# Altium PCB newMYPCB.PcbDoc
Units mil, origin at the board's own origin, x right, y up, seen from the top; angles counter-clockwise.
Board outline 6000 x 4000 mil, 2 copper layers (Top Layer, Bottom Layer); 56 components, 75 nets, 228 pads, 34 vias.
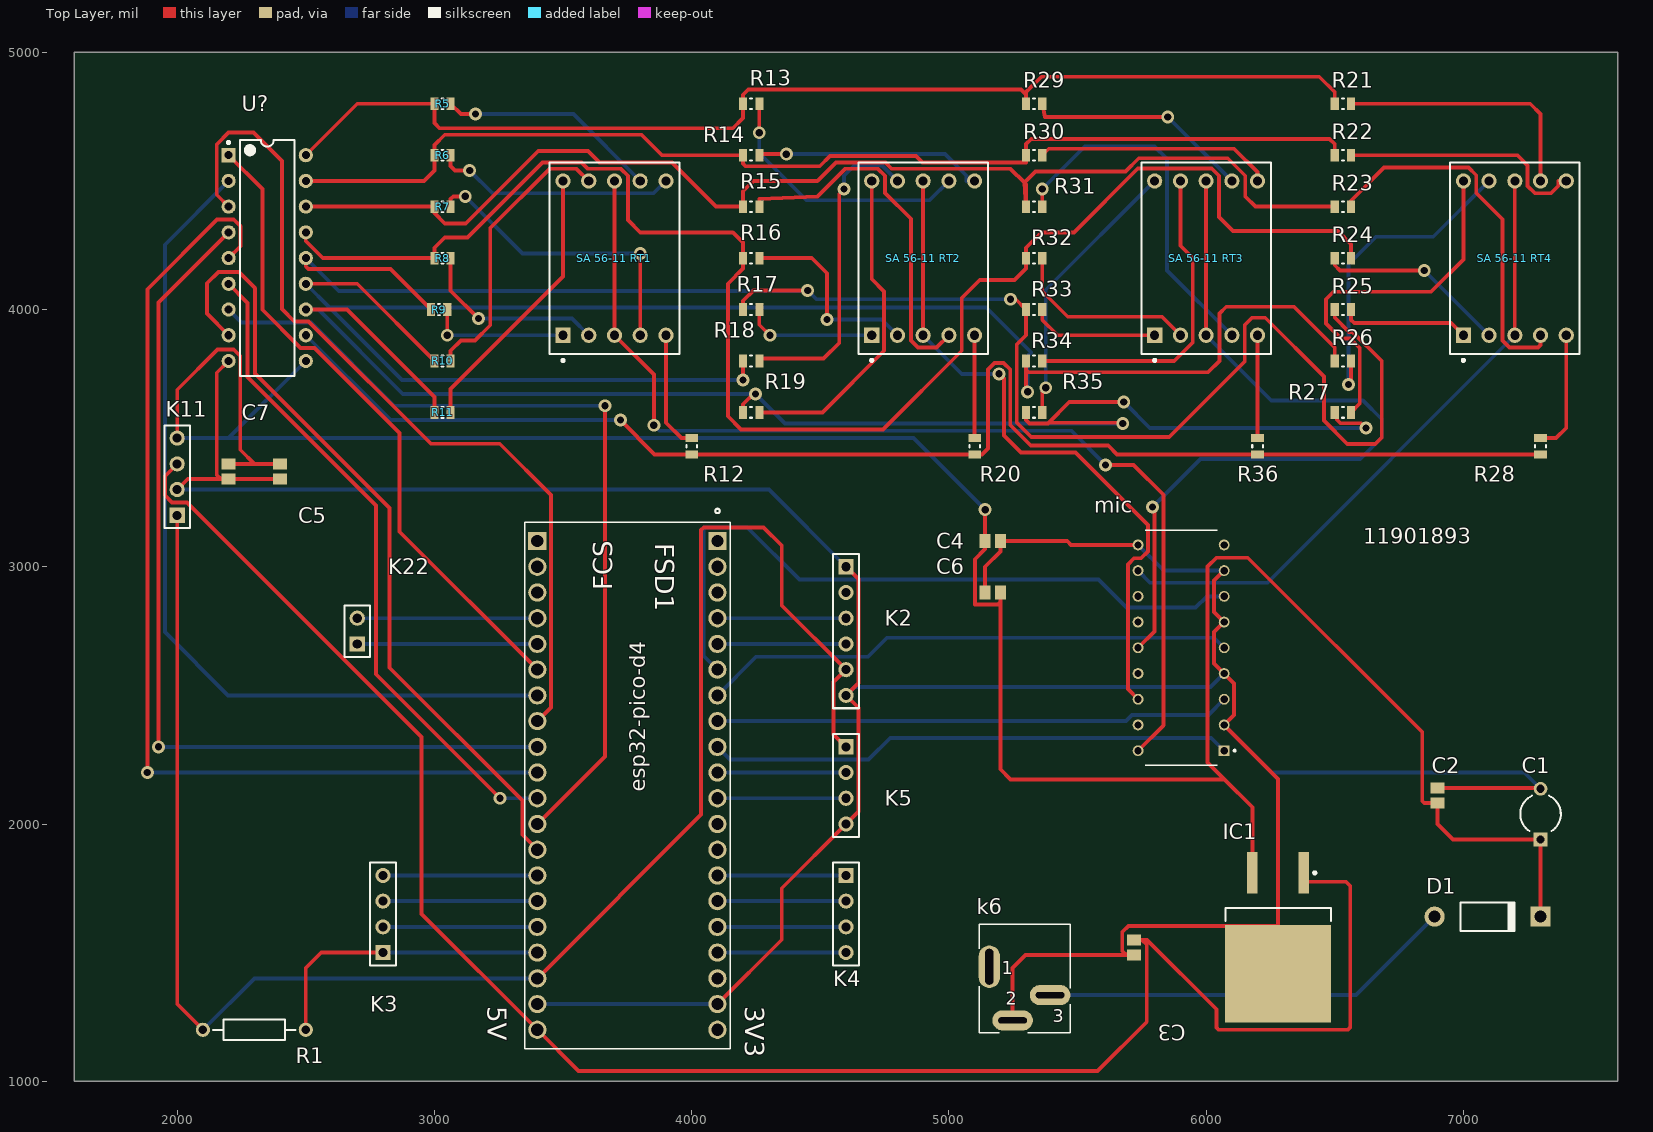
[diagram p0: Top Layer view]
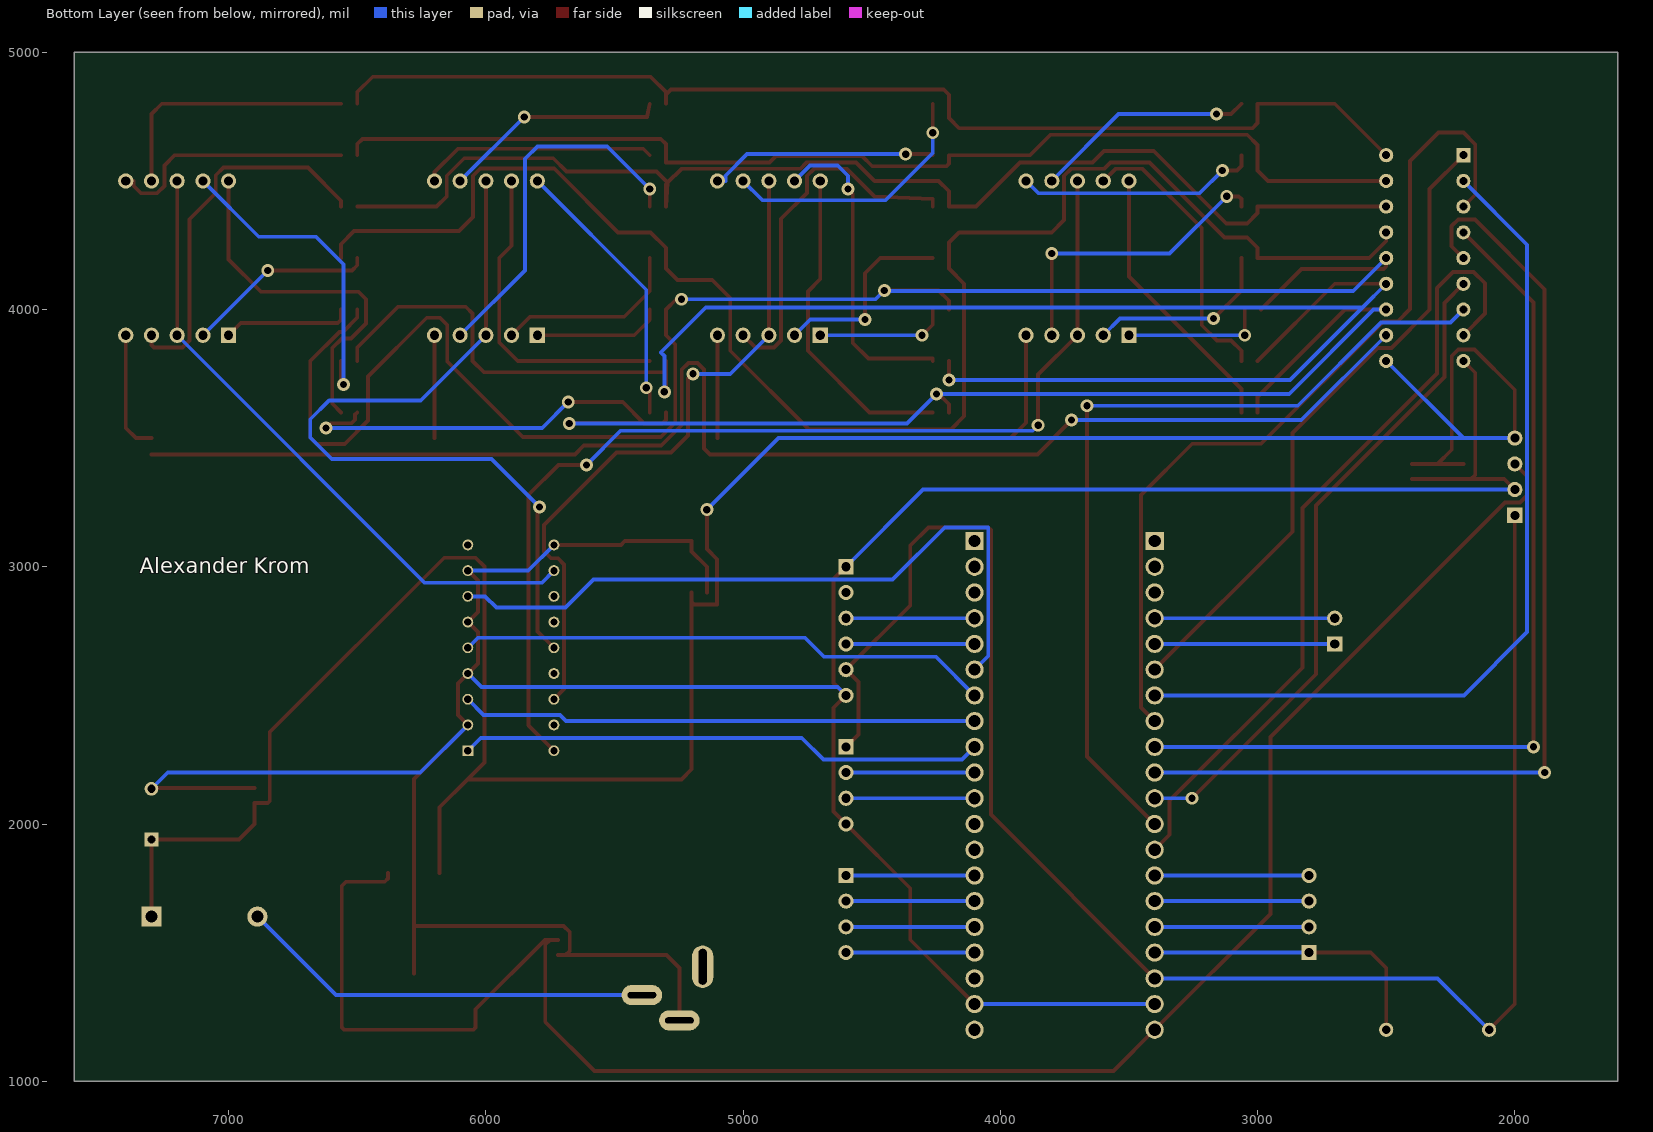
[diagram p1: Bottom Layer view, seen from below]

## Layer stack, top to bottom
Top Solder: solder mask 0.4, Solder Resist, Dk 3.5
Top Layer: signal copper 1.4
Dielectric 1: dielectric 12.6, FR-4, Dk 4.8
Bottom Layer: signal copper 1.4
Bottom Solder: solder mask 0.4, Solder Resist, Dk 3.5

## Board outline
1600,1000 7600,1000 7600,5000 1600,5000

## Design rules (kind name [scope] priority, off if disabled: settings)
Clearance [All] p1: gap=10 ignorepadtopadclearanceinfootprint=FALSE except(0: Arc-Hole Track-Hole SMDPad-Hole THPad-Hole Via-Hole Fill-Hole Poly-Hole Region-Hole Text-Hole)
PolygonConnect [All] p1: connectstyle=Relief reliefconductorwidth=10 reliefentries=4 polygonreliefangle="90 Angle" airgapwidth=10
RoutingVias [All] p1: holewidth=28 width=50 viastyle="Through Hole" minholewidth=28 minwidth=50 maxholewidth=28 maxwidth=50
SolderMaskExpansion [All] p1: expansion=4 istentingtop=FALSE
Width [All] p1: maxlimit=30 minlimit=10 preferedwidth=15 minimp=50.000000 maximp=50.000000 favimp=50.000000
30 further rules are at their usual default settings.

## Components (designator, comment, footprint, x,y, rotation, side; value= is the part's Value field where it differs from the comment)
C1 "Cap Pol1" CAPR5-4X5 7300,2038.42 r90 top value=100μF
C2 "Cap Pol3" C0805 6900,2110.47 r90 top value=330nF
C3 "Cap Pol3" C0805 5720,1520 r270 top value=100nF
C4 "Cap Pol3" C0805 5170.47,3100 r0 top value=1μF
C5 "Cap Pol3" C0805 2400,3370.47 r270 top value=1μ
C6 "Cap Pol3" C0805 5170.47,2900 r180 top value=100nF
C7 "Cap Pol3" C0805 2200,3370.47 r270 top value=100nF
D1 "Diode" DO-41 7094.09,1640 r0 top
esp32-pico-d4 "esp32-pico-d4" esp32picod4 3730,2155 r270 top
IC1 "L7805CD2T-TR" TO-263_M 6280,1560 r270 top
K2 "Header 6" HDR1X6 4600,3000 r270 top
K3 "Header 4" HDR1X4 2800,1500 r90 top
K4 "Header 4" HDR1X4 4600,1800 r270 top
K5 "Header 4" HDR1X4 4600,2300 r270 top
k6 "k6" k6 5300,1400 r0 top
K11 "Header 4" HDR1X4 2000,3200 r90 top
K22 "Header 2" HDR1X2 2700,2700 r90 top
mic "MIC2981" MIC2981 5900,2700 r180 top
R1 "Res2" AXIAL-0.4 2300,1200 r0 top value=1K
R5 "Res2" smd43 3031.5,4800 r0 top value=43Ω
R6 "Res2" smd43 3031.5,4600 r0 top value=43Ω
R7 "Res2" smd43 3031.5,4400 r0 top value=43Ω
R8 "Res2" smd43 3031.5,4200 r0 top value=43Ω
R9 "Res2" smd43 3018.5,4000 r0 top value=43Ω
R10 "Res2" smd43 3031.5,3800 r0 top value=43Ω
R11 "Res2" smd43 3031.5,3600 r0 top value=43Ω
R12 "Res2" smd43 4000,3468.5 r90 top value=680Ω
R13 "Res2" smd43 4231.5,4800 r0 top value=43Ω
R14 "Res2" smd43 4231.5,4600 r0 top value=43Ω
R15 "Res2" smd43 4231.5,4400 r0 top value=43Ω
R16 "Res2" smd43 4231.5,4200 r0 top value=43Ω
R17 "Res2" smd43 4231.5,4000 r0 top value=43Ω
R18 "Res2" smd43 4231.5,3800 r0 top value=43Ω
R19 "Res2" smd43 4231.5,3600 r0 top value=43Ω
R20 "Res2" smd43 5100,3468.5 r90 top value=680Ω
R21 "Res2" smd43 6531.5,4800 r0 top value=43Ω
R22 "Res2" smd43 6531.5,4600 r0 top value=43Ω
R23 "Res2" smd43 6531.5,4400 r0 top value=43Ω
R24 "Res2" smd43 6531.5,4200 r180 top value=43Ω
R25 "Res2" smd43 6531.5,4000 r0 top value=43Ω
R26 "Res2" smd43 6531.5,3800 r0 top value=43Ω
R27 "Res2" smd43 6531.5,3600 r0 top value=43Ω
R28 "Res2" smd43 7300,3468.5 r90 top value=680Ω
R29 "Res2" smd43 5331.5,4800 r0 top value=43Ω
R30 "Res2" smd43 5331.5,4600 r0 top value=43Ω
R31 "Res2" smd43 5331.5,4400 r0 top value=43Ω
R32 "Res2" smd43 5331.5,4200 r0 top value=43Ω
R33 "Res2" smd43 5331.5,4000 r0 top value=43Ω
R34 "Res2" smd43 5331.5,3800 r0 top value=43Ω
R35 "Res2" smd43 5331.5,3600 r0 top value=43Ω
R36 "Res2" smd43 6200,3468.5 r90 top value=680Ω
"SA 56-11 RT1" "Dpy Blue-CA" H 3700,4200 r0 top
"SA 56-11 RT2" "Dpy Blue-CA" H 4900,4200 r0 top
"SA 56-11 RT3" "Dpy Blue-CA" H 6000,4200 r0 top
"SA 56-11 RT4" "Dpy Blue-CA" H 7200,4200 r0 top
U? "ULN2803A" STM-DIP-18 2350,4200 r0 top

## Footprints (in the part's own frame and the unit in brackets; to place one, negate y for a bottom-side part, rotate by r counter-clockwise, add the part's x,y. Pads: shape width x height; smd on the part's side, far side on the other; paste and mask are expansions set on the pad)
AXIAL-0.4 [mm] "Axial Device, Thru-Hole; 2 Leads; 0.4 in Pin Spacing"
  round 1.4 hole 0.85: 1(-5.08,0) 2(5.08,0)
  silkscreen extent -4.06,-1.02 4.06,1.02
C0805 [mm] "Chip Capacitor, Body 2.0x1.3mm, IPC High Density"
  rect 1.1x1.4 smd: 1(-0.75,0) 2(0.75,0)
  body extent -1.1,-0.72 1.1,0.72, height 1.4
CAPR5-4X5 [mm] "Capacitor; 2 Leads"
  rect 1.35x1.35 hole 0.8: 1(-2.5,0)
  round 1.35 hole 0.8: 2(2.5,0)
  silkscreen extent -1.69,-2 1.82,2
DO-41 [mm] "Diode, Axial; Body 5.2 x 2.7 mm (LxDia. max), Lead Dia. 0.86 mm (max)"
  round 2 hole 1.2: 1(-5.23,0)
  rect 2x2 hole 1.2: 2(5.23,0)
  silkscreen extent -2.65,-1.4 2.75,1.4
esp32picod4 [mm]
  rect 1.8x1.8 hole 1.2: 1(-24.003,-8.382) 40(-24.003,9.398)
  round 1.8 hole 1.2: 2(-21.463,-8.382) 3(-18.923,-8.382) 4(-16.383,-8.382) 5(-13.843,-8.382) 6(-11.303,-8.382) 7(-8.763,-8.382) 8(-6.223,-8.382) 9(-3.683,-8.382) 10(-1.143,-8.382) 11(1.397,-8.382) 12(3.937,-8.382) 13(6.477,-8.382) 14(9.017,-8.382) 15(11.557,-8.382) 16(14.097,-8.382) 17(16.637,-8.382) 18(19.177,-8.382) 19(21.717,-8.382) 20(24.257,-8.382) 21(24.257,9.398) 22(21.717,9.398) 23(19.177,9.398) 24(16.637,9.398) 25(14.097,9.398) 26(11.557,9.398) 27(9.017,9.398) 28(6.477,9.398) 29(3.937,9.398) 30(1.397,9.398) 31(-1.143,9.398) 32(-3.683,9.398) 33(-6.223,9.398) 34(-8.763,9.398) 35(-11.303,9.398) 36(-13.843,9.398) 37(-16.383,9.398) 38(-18.923,9.398) 39(-21.463,9.398)
  silkscreen extent -27.2,-9.64 26.13,10.66
H [mm] "LED, 7-Segment Display, 14.2 mm, RHD; 10 Leads; Row Space 15.24 mm; Pitch 2.54 mm"
  rect 1.5x1.5 hole 0.9: 1(-5.08,-7.62)
  round 1.5 hole 0.9: 2(-2.54,-7.62) 3(0,-7.62) 4(2.54,-7.62) 5(5.08,-7.62) 6(5.08,7.62) 7(2.54,7.62) 8(0,7.62) 9(-2.54,7.62) 10(-5.08,7.62)
  silkscreen extent -6.4,-10.22 6.4,9.45, body extent -6.4,-9.45 6.4,9.45, height 8.25
HDR1X2 [mm] "Connector; Header; 2 Position"
  rect 1.5x1.5 hole 0.9: 1(0,0)
  round 1.5 hole 0.9: 2(2.54,0)
  silkscreen extent -1.27,-1.27 3.81,1.27
HDR1X4 [mm] "Connector; Header; 4 Position"
  rect 1.5x1.5 hole 0.9: 1(0,0)
  round 1.5 hole 0.9: 2(2.54,0) 3(5.08,0) 4(7.62,0)
  silkscreen extent -1.27,-1.27 8.89,1.27
HDR1X6 [mm] "Connector; Header; 6 Position"
  rect 1.5x1.5 hole 0.9: 1(0,0)
  round 1.5 hole 0.9: 2(2.54,0) 3(5.08,0) 4(7.62,0) 5(10.16,0) 6(12.7,0)
  silkscreen extent -1.27,-1.27 13.97,1.27
k6 [mm]
  oval 2.1x4.2 hole 0.8 slot 3.52 at 90 deg: 1(-3.627,1.143)
  oval 4x2 hole 0.6 slot 2.82 at 0 deg: 2(-1.327,-4.157) 3(2.373,-1.657)
  silkscreen extent -4.63,-5.36 4.37,5.34
MIC2981 [mm]
  rect 1.07x1.07 hole 0.72: 1(-4.318,10.541)
  round 1.07 hole 0.72: 2(-4.318,8.001) 3(-4.318,5.461) 4(-4.318,2.921) 5(-4.318,0.381) 6(-4.318,-2.159) 7(-4.318,-4.699) 8(-4.318,-7.239) 9(-4.318,-9.779) 10(4.182,-9.779) 11(4.182,-7.239) 12(4.182,-4.699) 13(4.182,-2.159) 14(4.182,0.381) 15(4.182,2.921) 16(4.182,5.461) 17(4.182,8.001) 18(4.182,10.541)
  silkscreen extent -5.45,-11.24 3.48,12
smd43 [mm]
  rect 0.8x1.25 smd: 1(-0.8,0) 2(0.8,0)
  silkscreen extent -0.1,-0.53 0.1,0.53, body extent -1.05,-0.67 1.05,0.67, height 0.6
STM-DIP-18 [mm] "DIP, 18-Leads, Body 23.25x7.1mm, Pitch 2.54mm"
  rect 1.4x1.4 hole 0.8: 1(-3.81,10.16)
  round 1.4 hole 0.8: 2(-3.81,7.62) 3(-3.81,5.08) 4(-3.81,2.54) 5(-3.81,0) 6(-3.81,-2.54) 7(-3.81,-5.08) 8(-3.81,-7.62) 9(-3.81,-10.16) 10(3.81,-10.16) 11(3.81,-7.62) 12(3.81,-5.08) 13(3.81,-2.54) 14(3.81,0) 15(3.81,2.54) 16(3.81,5.08) 17(3.81,7.62) 18(3.81,10.16)
  silkscreen extent -3.93,-11.65 2.7,11.65, body extent -3.93,-11.63 3.93,11.63, height 3.93
TO-263_M [mm] "D2-PAK, 4-Leads, Body 9.2x10.2mm, Pitch 2.54mm, Lead Span 15.4mm, IPC Low Density"
  rect 4.1x1.05 smd: 1(-6.35,2.54) 3(-6.35,-2.54)
  rect 9.6x10.45 smd: 4(3.6,0)
  silkscreen extent -6.47,-5.2 -1.6,5.2, body extent -2.9,-5.2 6.45,5.2, height 4.6

## Part data
C1: "Polarized Capacitor (Radial)", LatestRevisionDate=17-Jul-2002, LatestRevisionNote="Re-released for DXP Platform.", PackageDescription="Polarized Capacitor (Radial); 2 Leads", PackageReference=RB7.6-15, Published=8-Jun-2000, Publisher="Altium Limited"
C2 C3 C4 C5 C6 C7: "Polarized Capacitor (Surface Mount)", LatestRevisionDate=29-May-2009, LatestRevisionNote="IPC-7351 Footprint Added.", PackageDescription="Chip Capacitor", PackageReference=C0805, Published=8-Jun-2000, Publisher="Altium Limited"
D1: library part "Diode 1N4002", "1 Amp General Purpose Rectifier", Code_JEDEC=DO-204-AL, ComponentLink1Description="Manufacturer Link", ComponentLink1URL=http://www.fairchildsemi.com/, ComponentLink2Description=Datasheet, ComponentLink2URL=http://www.fairchildsemi.com/ds/1N%2F1N4001.pdf, DatasheetVersion=1998, LatestRevisionDate=17-Jul-2002, LatestRevisionNote="Re-released for DXP Platform.", PackageDescription="Diode, Axial; Body 5.2 x 2.7 mm (LxDia. max), Lead Dia. 0.86 mm (max)", PackageReference=DO-41, PackageVersion=Aug-1999, Published=8-Jun-2000, Publisher="Altium Limited"
esp32-pico-d4: library part "picoESP32-PICO-KIT V"
IC1: library part CMP-0244-00213-1, "Positive Voltage Regulator, 3-Pin D2PAK, Tape and Reel", ComponentLink1Description="Manufacturer URL", ComponentLink1URL=http://www.st.com, ComponentLink2Description=Datasheet, ComponentLink2URL=http://www.st.com/internet/com/TECHNICAL_RESOURCES/TECHNICAL_LITERATURE/DATASHEET/CD00000444.pdf, DatasheetVersion=16/11/2011, PackageDescription="3-Pin Transistor Outline Package 2.54 mm Pitch, 15.4 mm Lead Span (D2PAK)", PackageReference=TO-263, PackageVersion=2011
K2: "Header, 6-Pin", LatestRevisionDate=17-Jul-2002, LatestRevisionNote="Re-released for DXP Platform.", Publisher="Altium Limited"
K3 K4 K5 K11: "Header, 4-Pin", LatestRevisionDate=17-Jul-2002, LatestRevisionNote="Re-released for DXP Platform.", Publisher="Altium Limited"
K22: "Header, 2-Pin", LatestRevisionDate=17-Jul-2002, LatestRevisionNote="Re-released for DXP Platform.", Publisher="Altium Limited"
R1 R5 R6 R7 R8 R9 R10 R11 R12 R13 R14 R15 R16 R17 R18 R19 R20 R21 R22 R23 R24 R25 R26 R27 R28 R29 R30 R31 R32 R33 R34 R35 R36: "Resistor", LatestRevisionDate=17-Jul-2002, LatestRevisionNote="Re-released for DXP Platform.", PackageDescription="Axial Device, Thru-Hole; 2 Leads; 0.4 in Pin Spacing", PackageReference=AXIAL-0.4, Published=8-Jun-2000, Publisher="Altium Limited"
"SA 56-11 RT1": "14.2 mm General Purpose Blue 7-Segment Display: CA, RH DP, Gray Surface", Colour=Blue, ComponentLink1Description="Manufacturer Link", ComponentLink1URL=http://www.agilent.com/, DatasheetVersion=24-Sep-2002, LatestRevisionDate=17-Dec-2003, LatestRevisionNote="Schematic revised, PCB Footprint replaced.", MinimumIntensity="2020 ucd", Note="IF = 10 mA", PackageDescription="LED, 7-Segment Display, 14.2 mm, RHD; 10 Leads; Row Space 15.24 mm; Pitch 2.54 mm", PackageReference=H, PackageVersion=24-Sep-2002, Published=8-Jun-2000, Publisher="Altium Limited"
"SA 56-11 RT2" "SA 56-11 RT3" "SA 56-11 RT4": "14.2 mm General Purpose Blue 7-Segment Display: CA, RH DP, Gray Surface", Colour=red, ComponentLink1Description="Manufacturer Link", ComponentLink1URL=http://www.agilent.com/, DatasheetVersion=24-Sep-2002, LatestRevisionDate=17-Dec-2003, LatestRevisionNote="Schematic revised, PCB Footprint replaced.", MinimumIntensity="2020 ucd", Note="IF = 10 mA", PackageDescription="LED, 7-Segment Display, 14.2 mm, RHD; 10 Leads; Row Space 15.24 mm; Pitch 2.54 mm", PackageReference=H, PackageVersion=24-Sep-2002, Published=8-Jun-2000, Publisher="Altium Limited"
U?: library part CMP-2000-05363-1, "Eight Darlington Arrays, 50 V, 2.25 W, 500 mA, 18-Pin DIP, RoHS, Tube", Collector Emitter Voltage V(br)ceo=50V, DC Collector Current=500mA, DC Current Gain hFE=1000hFE, Manufacturer=STMicroelectronics, Operating Temperature Max=85degC, Package Description="18-Pin Double In-line Package, Body 24.8 x 7.1 mm, Pitch 2.54 mm", Package Reference=DIP-18, Power Dissipation Pd=2.25W, Transistor Case Style=DIP, Automotive Qualification Standard=-, Datasheet URL=https://datasheet.ciiva.com/29306/171824-da-01-en-ic-uln2803-dil18-29306026.pdf, Datasheet Version=Sep-03, Manufacturer URL=http://www.st.com/, MSL=-, No. of Pins=18Pins, Product Range=-, SVHC=NoSVHC(17-Dec-2015), Transistor Polarity=NPN

## Via types
v1: diameter 50, hole 28, Top Layer to Bottom Layer, 34 vias

## Nets (pads, with @x,y where several pads share a name; then routed paths per layer and width w, separated by ;. In a path a pad name is that pad's centre, name@x,y a point inside that pad or via, vN(x,y) a via of type N, cw(c..) or ccw(c..) an arc to the next point about the centre after c; other vN are vias at no path point)
+3.3: esp32-pico-d4.18 K2.5 K5.1 K11.1 R1.1 | length 6703.6
  Top Layer w15: K11.1 2000,1300 R1.1 ; esp32-pico-d4.18 4037,2037 4037,3143 4047,3153 4280,3153 4350,3083 4350,2850 K2.5 4552,2552 4552,2348 K5.1
  Bottom Layer w15: R1.1 2300,1400 esp32-pico-d4.18
+5: C3.1 esp32-pico-d4.20 IC1.1 K11.3 | length 7488.9
  Top Layer w15: K11.3 1952,3352 1952,3278 1980,3250 2038,3250 2950,2338 2950,1650 esp32-pico-d4.20 3560,1040 5578,1040 5769,1231 5769,1530.53 5750,1549.53 ; C3.1 5750,1549.53 ; IC1.1 6380,1788.79 6393.17,1775.62 6544.38,1775.62 6560,1760 6560,1208.79 6551.21,1200 6048.79,1200 6040,1208.79 6040,1280 5770.47,1549.53 5750,1549.53
+12: C1.1 C2.1 C4.1 C5.1 C6.1 C7.1 D1.2 IC1.3 K11.4 U?.10 | length 10424.6
  Top Layer w15: K11.4 2000,3688 2157.06,3845.06 2220,3845.06 2245.06,3820 2245.06,3454.94 2300,3400 ; C7.1 2300,3400 ; C5.1 2300,3400 ; v1(5140.94,3222) C4.1 5140.94,3069 5101,3029.06 5101,2853 5190,2853 5200,2863 ; C6.1 5200,2863 ; IC1.3 6180,2065 6072,2173 ; D1.2 C1.1 6960,1940 6900,2000 C2.1 6848.79,2080.94 6840,2089.73 6840,2357 6162,3035 6040,3035 6006,3001 6006,2239 6072,2173 ; 5200,2863 5200,2213 5240,2173 6072,2173
  Bottom Layer w15: K11.4 2200,3500 ; U?.10 2200,3500 ; v1(5140.94,3222) 4862.94,3500 2200,3500
+VIN: D1.1 k6.3 | length 1621.2
  Bottom Layer w15: k6.3 6582.95,1334.76 D1.1
GND: C1.2 C2.2 C3.2 C4.2 C5.2 C6.2 C7.2 esp32-pico-d4.19 esp32-pico-d4.22 IC1.4 K2.1 K2.6 K5.4 k6.2 K11.2 mic.2 mic.4 mic.6 mic.8 mic.10 U?.9 | length 13853.5
  Top Layer w15: K11.2 2040.94,3340.94 2170,3340.94 ; U?.9 2154,3754 2154,3356.94 2170,3340.94 ; C5.2 C7.2 2170,3340.94 ; esp32-pico-d4.22 4350,1550 4350,1750 K5.4 4648,2048 4648,2452 K2.6 4648,2548 4648,2952 K2.1 ; C6.2 5140.94,3000 5200,3059.06 C4.2 5460,3100 5475,3085 mic.10 ; k6.2 5247.76,1440 5298.23,1490.47 5690,1490.47 ; C3.2 5690,1490.47 ; mic.8 6031,2946 6031,2824 mic.6 6031,2746 6031,2624 mic.4 6109,2546 6109,2424 mic.2 6280,2175 IC1.4@6280,1604 ; IC1.4 IC1.4@6280,1604 ; C2.2 7100,2140 7100.31,2139.69 7297.16,2139.69 C1.2 ; 5690,1490.47 5674,1506.47 5674,1580 5698,1604 IC1.4@6280,1604
  Bottom Layer w15: K11.2 4300,3300 K2.1 ; esp32-pico-d4.19 esp32-pico-d4.22 ; K2.6 4632,2532 6017,2532 mic.4 ; mic.10 5835.35,2985 mic.8 ; mic.2 6255,2200 7236.85,2200 C1.2
I1: esp32-pico-d4.6 U?.1 | length 2528.7
  Top Layer w15: U?.1 2331,4469 2331,3999 2480,3850 2534,3850 2863.7,3520.3 2863.7,3136.3 esp32-pico-d4.6
I2: esp32-pico-d4.7 U?.2 | length 3406.6
  Bottom Layer w15: U?.2 1952,4252 1952,2746 2198,2500 esp32-pico-d4.7
I3: esp32-pico-d4.8 U?.3 | length 3401.1
  Top Layer w15: U?.3 2154,4446 2154,4642 2200,4688 2297,4688 2407,4578 2407,4002 2455,3954 2510,3954 2986,3478 3254,3478 3453,3279 3453,2453 esp32-pico-d4.8
I4: esp32-pico-d4.9 U?.4 | length 3586.1
  Top Layer w15: v1(1927,2300) 1927,4027 U?.4
  Bottom Layer w15: v1(1927,2300) esp32-pico-d4.9
I5: esp32-pico-d4.10 U?.5 | length 4023.1
  Top Layer w15: v1(1884,2200) 1884,4079 2155,4350 2220,4350 2246,4324 2246,4246 U?.5
  Bottom Layer w15: v1(1884,2200) esp32-pico-d4.10
I6: esp32-pico-d4.11 U?.6 | length 2582
  Top Layer w15: U?.6 2274,4026 2274,3737 2773,3238 2773,2582 v1(3255,2100)
  Bottom Layer w15: v1(3255,2100) esp32-pico-d4.11
I7: esp32-pico-d4.12 U?.7 | length 3352.9
  Top Layer w15: esp32-pico-d4.12 3663,2263 v1(3663,3626)
  Bottom Layer w15: U?.7 2250,3950 2520,3950 2844,3626 v1(3663,3626)
I8: esp32-pico-d4.13 U?.8 | length 3105.5
  Top Layer w15: U?.8 2116,3984 2116,4102 2160,4146 2240,4146 2303,4083 2303,3752 2826,3229 2826,2607.26 3342,2091.26 3342,1958 esp32-pico-d4.13
Netesp32-pico-d4_4: esp32-pico-d4.4 K22.2 | length 700
  Bottom Layer w15: K22.2 esp32-pico-d4.4
Netesp32-pico-d4_5: esp32-pico-d4.5 K22.1 | length 700
  Bottom Layer w15: K22.1 esp32-pico-d4.5
Netesp32-pico-d4_14: esp32-pico-d4.14 K3.4 | length 600
  Bottom Layer w15: K3.4 esp32-pico-d4.14
Netesp32-pico-d4_15: esp32-pico-d4.15 K3.3 | length 600
  Bottom Layer w15: K3.3 esp32-pico-d4.15
Netesp32-pico-d4_16: esp32-pico-d4.16 K3.2 | length 600
  Bottom Layer w15: K3.2 esp32-pico-d4.16
Netesp32-pico-d4_17: esp32-pico-d4.17 K3.1 R1.2 | length 1164.9
  Top Layer w15: R1.2 2500,1440 2560,1500 K3.1
  Bottom Layer w15: K3.1 esp32-pico-d4.17
Netesp32-pico-d4_24: esp32-pico-d4.24 K4.4 | length 500
  Bottom Layer w15: esp32-pico-d4.24 K4.4
Netesp32-pico-d4_25: esp32-pico-d4.25 K4.3 | length 500
  Bottom Layer w15: esp32-pico-d4.25 K4.3
Netesp32-pico-d4_26: esp32-pico-d4.26 K4.2 | length 500
  Bottom Layer w15: esp32-pico-d4.26 K4.2
Netesp32-pico-d4_27: esp32-pico-d4.27 K4.1 | length 500
  Bottom Layer w15: esp32-pico-d4.27 K4.1
Netesp32-pico-d4_30: esp32-pico-d4.30 K5.3 | length 500
  Bottom Layer w15: esp32-pico-d4.30 K5.3
Netesp32-pico-d4_31: esp32-pico-d4.31 K5.2 | length 500
  Bottom Layer w15: esp32-pico-d4.31 K5.2
Netesp32-pico-d4_32: esp32-pico-d4.32 mic.1 | length 2045.8
  Bottom Layer w15: esp32-pico-d4.32 4149,2251 4688,2251 4772,2335 6020,2335 mic.1
Netesp32-pico-d4_33: esp32-pico-d4.33 mic.3 | length 2005.2
  Bottom Layer w15: esp32-pico-d4.33 5688,2400 5712,2424 6009,2424 mic.3
Netesp32-pico-d4_34: esp32-pico-d4.34 mic.5 | length 2078.9
  Bottom Layer w15: esp32-pico-d4.34 4250,2650 4686,2650 4760,2724 6031,2724 mic.5
Netesp32-pico-d4_35: esp32-pico-d4.35 mic.7 | length 2745.4
  Bottom Layer w15: esp32-pico-d4.35 4047,2653 4047,3153 4216,3153 4419,2950 5582,2950 5691,2841 5959,2841 6003,2885 mic.7
Netesp32-pico-d4_36: esp32-pico-d4.36 K2.4 | length 500
  Bottom Layer w15: esp32-pico-d4.36 K2.4
Netesp32-pico-d4_37: esp32-pico-d4.37 K2.3 | length 500
  Bottom Layer w15: esp32-pico-d4.37 K2.3
Netmic_11: "SA 56-11 RT4.3" "SA 56-11 RT4.8" mic.11 | length 2482.6
  Top Layer w15: 7200,3900 7200,4500
  Bottom Layer w15: mic.11 5782.35,2938 6238,2938 7200,3900
Netmic_14: "SA 56-11 RT3.3" "SA 56-11 RT3.8" mic.14 | length 3069
  Top Layer w15: mic.14 5798.92,2748.56 5798.92,3224.08 v1(5791,3232) ; 6000,3900 6000,4500
  Bottom Layer w15: v1(5791,3232) 5978,3419 6599.1,3419 6682.5,3502.4 6682.5,3573.5 6609.12,3646.88 6253.12,3646.88 6000,3900
Netmic_16: "SA 56-11 RT2.3" "SA 56-11 RT2.8" mic.16 | length 2650.5
  Top Layer w15: 4900,3900 4900,4500 ; v1(5195,3750) 5213.67,3731.33 5213.67,3510.33 5280,3444 5492,3444 5773.92,3162.08 5773.92,3060 5746.92,3033 5720,3033 5696,3009 5696,2524.35 mic.16
  Bottom Layer w15: 4900,3900 5050,3750 v1(5195,3750)
Netmic_18: "SA 56-11 RT1.3" "SA 56-11 RT1.8" mic.18 | length 4142.1
  Top Layer w15: 3700,4500 3700,3900 3853,3747 v1(3853,3550) ; v1(5609,3396) 5718,3396 5834,3280 5834,2383.65 mic.18
  Bottom Layer w15: v1(3853,3550) 3874,3529 5476,3529 v1(5609,3396)
O1: R5.1 R13.1 R21.1 R29.1 U?.18 | length 4430
  Top Layer w15: U?.18 2700,4800 R5.1 3000,4724.5 3020,4704.5 4160,4704.5 4200,4744.5 R13.1 4200,4835 4220,4855 5280,4855 5300,4835 ; R29.1 5300,4835 ; R21.1 6500,4845 6440,4905 5360,4905 5300,4845 5300,4835
O2: R6.1 R14.1 R22.1 R30.1 U?.17 | length 4360.2
  Top Layer w15: U?.17 2960,4500 3000,4540 R6.1 3000,4639.5 3040,4679.5 3804.5,4679.5 3884,4600 R14.1 4200,4567 4210,4557 4498.11,4557 4538.14,4597.03 4872.31,4597.03 4897.31,4572.03 5300,4572.03 R30.1 5300,4643 5320,4663 6480,4663 6500,4643 R22.1
O3: R7.1 R15.1 R23.1 R31.1 U?.16 | length 4740.6
  Top Layer w15: U?.16 R7.1 3000,4375 3040,4335 3122,4335 3403.5,4616.5 3597.03,4616.5 3641.5,4572.03 3922.97,4572.03 4095,4400 R15.1 4200,4460 4240,4500 4488.49,4500 4560.52,4572.03 4752.97,4572.03 4777.97,4547.03 5240,4547.03 5293.51,4493.51 ; R23.1 6192,4400 6152,4440 6152,4520 6084,4588 5738,4588 5687,4537 5337,4537 5293.51,4493.51 ; 5293.51,4493.51 R31.1 5300,4487.03 5293.51,4493.51
O4: R8.1 R16.1 R24.1 R32.1 U?.15 | length 6167.9
  Top Layer w15: U?.15 2500,4266 2566,4200 R8.1 3000,4240 3040,4280 3128.46,4280 3420.49,4572.03 3572.03,4572.03 3597.03,4547.03 3724.97,4547.03 3752,4520 3752,4348 3800,4300 4160,4300 4200,4260 R16.1 4200,4159 4141,4100 4141,3585 4192,3534 4744,3534 5050,3840 5050,4045 5120,4115 5255,4115 5300,4160 R32.1 5300,4240 5360,4300 5486,4300 5734,4548 6022,4548 6050,4520 6050,4360 6105,4305 6511.99,4305 6562.99,4254 R24.1
O5: R9.1 R17.1 R25.1 R33.1 U?.14 | length 6842.6
  Top Layer w15: U?.14 2500,4168 2510,4158 2829.01,4158 R9.1 ; R17.1 4200,4034 4240,4074 v1(4451,4074) ; v1(5240,4040) 5260,4040 R33.1 5300,3900 5263.67,3863.67 5263.67,3560.83 5320,3504.5 5856.5,3504.5 6150,3798 6150,3940 6178,3968 6230,3968 6458,3740 6458,3568 6548.5,3477.5 6657.6,3477.5 6682.5,3502.4 6682.5,3799.86 6569.36,3913 6556,3913 6500,3969 R25.1
  Bottom Layer w15: U?.14 2628,4072 v1@4453,4072 ; v1(4451,4074) v1@4453,4072 ; v1(5240,4040) 4485,4040 v1@4453,4072
O6: R10.1 R18.1 R26.1 R34.1 U?.13 | length 7171
  Top Layer w15: U?.13 2700,4100 R10.1 ; v1(4200,3726) R18.1 ; R34.1 5300,3766 ; v1(5306.17,3680) 5300,3686.17 5300,3766 ; R26.1 6500,3853 6342,4011 6078,4011 6052,3985 6052,3800 6008,3756 5310,3756 5300,3766
  Bottom Layer w15: U?.13 2592.4,4007.6 ; v1(4200,3726) 2874,3726 2592.4,4007.6 ; v1(5306.17,3680) 5306.17,3819.17 5320,3833 5145.4,4007.6 2592.4,4007.6
O7: R11.1 R19.1 R27.1 R35.1 U?.12 | length 6036
  Top Layer w15: U?.12 2660,4000 3000,3660 R11.1 ; R19.1 4200,3632 4240,3672 v1(4248,3672) ; R35.1 5300,3591 5300,3571 5314,3557 5334,3557 5385.1,3557 5468.1,3640 v1(5680,3640) ; 5388.1,3560 5673,3560 v1(5676,3557) ; R27.1 6508.25,3591.75 6508.25,3572.75 6513.64,3567.36 6513.64,3566.68 6522.42,3557.89 6602.11,3557.89 v1(6621.05,3538.95)
  Bottom Layer w15: U?.12 2548.9,4000 2876.9,3672 v1(4248,3672) 4363,3557 v1(5676,3557) ; v1(5680,3640) 5781.05,3538.95 v1(6621.05,3538.95)
O8: R12.1 R20.1 R28.1 R36.1 U?.11 | length 5592.7
  Top Layer w15: v1(3723.01,3570) 3856,3437.01 R12.1 R20.1 5129.01,3437.01 5152,3460 5152,3767.1 5177.4,3792.5 5212.6,3792.5 5238.67,3766.44 5238.67,3550.48 5318.14,3471 5619.55,3471 5653.54,3437.01 R36.1 6750,3437.01 R28.1
  Bottom Layer w15: U?.11 2830,3570 v1(3723.01,3570)
R5: "SA 56-11 RT1.7" R5.2 | length 861.3
  Top Layer w15: R5.2 3102.99,4760 v1(3160,4760)
  Bottom Layer w15: v1(3160,4760) 3540,4760 3800,4500
R6: "SA 56-11 RT1.6" R6.2 | length 942.8
  Top Layer w15: R6.2 3062.99,4558.01 3080,4541 v1(3137,4541)
  Bottom Layer w15: v1(3137,4541) 3226,4452 3852,4452 3900,4500
R7: "SA 56-11 RT1.4" R7.2 | length 1181.1
  Top Layer w15: R7.2 3062.99,4430 3072.99,4440 v1(3120,4440) ; 3800,3900 v1(3800,4218)
  Bottom Layer w15: v1(3120,4440) 3342,4218 v1(3800,4218)
R8: "SA 56-11 RT1.2" R8.2 | length 735.7
  Top Layer w15: R8.2 3062.99,4073.01 v1(3171,3965)
  Bottom Layer w15: v1(3171,3965) 3535,3965 3600,3900
R9: "SA 56-11 RT1.1" R9.2 | length 550
  Top Layer w15: v1(3050,3900) R9.2
  Bottom Layer w15: v1(3050,3900) 3500,3900
R10: "SA 56-11 RT1.9" R10.2 | length 1110.8
  Top Layer w15: R10.2 3062.99,3840 3102.99,3880 3158,3880 3217,3939 3217,4317.03 3447,4547.03 3552.97,4547.03 3600,4500
R11: "SA 56-11 RT1.10" R11.2 | length 1081
  Top Layer w15: R11.2 3062.99,3690.99 3500,4128 3500,4500
R12: "SA 56-11 RT1.5" R12.2 | length 464.9
  Top Layer w15: 3900,3900 3900,3560 3960,3500 R12.2
R13: "SA 56-11 RT2.7" R13.2 | length 1035.9
  Top Layer w15: v1(4262.99,4687) R13.2
  Bottom Layer w15: v1(4262.99,4687) 4262.99,4607.9 4445.89,4425 4925,4425 5000,4500
R14: "SA 56-11 RT2.6" R14.2 | length 895.8
  Top Layer w15: R14.2 4262.99,4604 v1(4368,4604)
  Bottom Layer w15: v1(4368,4604) 4985,4604 5069,4520 5069,4500 5100,4500
R15: "SA 56-11 RT2.4" R15.2 | length 1435.7
  Top Layer w15: R15.2 4262.99,4430 4488.99,4440 4596.02,4547.03 4724.97,4547.03 4752,4520 4752,4453 4852,4353 4852,3880 4880,3852 4952,3852 5000,3900
R16: "SA 56-11 RT2.2" R16.2 | length 766.7
  Top Layer w15: R16.2 4467,4200 4526,4141 v1(4526,3961)
  Bottom Layer w15: v1(4526,3961) 4739,3961 4800,3900
R17: "SA 56-11 RT2.1" R17.2 | length 513
  Top Layer w15: R17.2 4262.99,3941.01 v1(4304,3900)
  Bottom Layer w15: v1(4304,3900) 4700,3900
R18: "SA 56-11 RT2.9" R18.2 | length 1252.2
  Top Layer w15: R18.2 4262.99,3809 4513,3809 4574,3870 4574,4450 v1(4592,4468)
  Bottom Layer w15: v1(4592,4468) 4592,4520 4632,4560 4740,4560 4800,4500
R19: "SA 56-11 RT2.10" R19.2 | length 1264.3
  Top Layer w15: R19.2 4508,3600 4748,3840 4748,4070 4700,4118 4700,4500
R20: "SA 56-11 RT2.5" R20.2 | length 400
  Top Layer w15: R20.2 5100,3900
R21: "SA 56-11 RT4.7" R21.2 | length 1013.6
  Top Layer w15: R21.2 7260,4800 7300,4760 7300,4500
R22: "SA 56-11 RT4.6" R22.2 | length 976.8
  Top Layer w15: R22.2 7210,4600 7250,4560 7250,4480 7278,4452 7341,4452 7369,4480 7369,4500 7400,4500
R23: "SA 56-11 RT4.4" R23.2 | length 1461.9
  Top Layer w15: R23.2 6562.99,4423 6691.99,4552 7020,4552 7050,4522 7050,4453 7152,4351 7152,3880 7180,3852 7290,3852 7300,3862 7300,3900
R24: "SA 56-11 RT4.2" R24.2 | length 740.7
  Top Layer w15: R24.2 6500,4172 6520,4152 v1(6848,4152)
  Bottom Layer w15: v1(6848,4152) 7100,3900
R25: "SA 56-11 RT4.1" R25.2 | length 501.9
  Top Layer w15: R25.2 6562.99,3960 6576.02,3946.98 6953.02,3946.98 7000,3900
R26: "SA 56-11 RT4.9" R26.2 | length 1244
  Top Layer w15: v1(6554,3707.98) 6562.99,3716.98 R26.2
  Bottom Layer w15: v1(6554,3707.98) 6554,4176 6661,4283 6883,4283 7100,4500
R27: "SA 56-11 RT4.10" R27.2 | length 1432.4
  Top Layer w15: R27.2 6597,3634.01 6597,3850 6559.4,3887.6 6523.88,3887.6 6466,3945.48 6466,4040 6495,4069 6874,4069 7000,4195 7000,4500
R28: "SA 56-11 RT4.5" R28.2 | length 476.6
  Top Layer w15: R28.2 7360,3500 7400,3540 7400,3900
R29: "SA 56-11 RT3.7" R29.2 | length 881.3
  Top Layer w15: R29.2 5373.99,4749 v1(5851,4749)
  Bottom Layer w15: v1(5851,4749) 6100,4500
R30: "SA 56-11 RT3.6" R30.2 | length 919.1
  Top Layer w15: R30.2 5387.99,4625 6109,4625 6200,4534 6200,4500
R31: "SA 56-11 RT3.4" R31.2 | length 1432.6
  Top Layer w15: R31.2 v1(5362.99,4469)
  Bottom Layer w15: v1(5362.99,4469) 5527.99,4634 5800,4634 5848,4586 5848,4152 6100,3900
R32: "SA 56-11 RT3.2" R32.2 | length 736.8
  Top Layer w15: R32.2 5362.99,4071.01 5462,3972 5828,3972 5900,3900
R33: "SA 56-11 RT3.1" R33.2 | length 501.9
  Top Layer w15: R33.2 5362.99,3960 5422.99,3900 5800,3900
R34: "SA 56-11 RT3.9" R34.2 | length 1262.7
  Top Layer w15: R34.2 5876,3800 5948,3872 5948,4200 5900,4248 5900,4500
R35: "SA 56-11 RT3.10" R35.2 | length 1081
  Top Layer w15: R35.2 5362.99,3682 v1(5376.75,3695.75)
  Bottom Layer w15: v1(5376.75,3695.75) 5376.75,4076.75 5800,4500
R36: "SA 56-11 RT3.5" R36.2 | length 400
  Top Layer w15: R36.2 6200,3900
pads on no net: esp32-pico-d4.1 esp32-pico-d4.2 esp32-pico-d4.3 esp32-pico-d4.21 esp32-pico-d4.23 esp32-pico-d4.28 esp32-pico-d4.29 esp32-pico-d4.38 esp32-pico-d4.39 esp32-pico-d4.40 K2.2 k6.1 mic.9 mic.12 mic.13 mic.15 mic.17

## Silkscreen, mask and mechanical layers (free items; w line width, h text height)
Top Overlay:
  text "11901893" at 6610,3090 h60
Bottom Overlay:
  text "Alexander Krom" at 7346,2974 h60
MechanicalMe:
  the board outline again, w10

## Text inside footprints (layer, text, board x,y; h text height)
esp32-pico-d4: Top Overlay "FCS" at 3692.19,2907.81 h73.82 r90; Top Overlay "5V" at 3207.81,1292.19 h73.82 r270; Top Overlay "FSD1" at 3857.81,3092.19 h73.82 r270; Top Overlay "3V3" at 4207.81,1292.19 h73.82 r270
k6: Top Overlay "1" at 5206.42,1415.87 h50; Top Overlay "3" at 5404.45,1228.86 h50; Top Overlay "2" at 5221.38,1296.57 h50